# Altium PCB VCO_BFR92_pcb.PcbDoc
Units mm, origin at the board's own origin, x right, y up, seen from the top; angles counter-clockwise.
Board outline 60.58 x 30.35 mm, 2 copper layers (Top Layer, Bottom Layer); 40 components, 21 nets, 91 pads, 14 vias.
Unrouted connection lines stored in the file: 6.
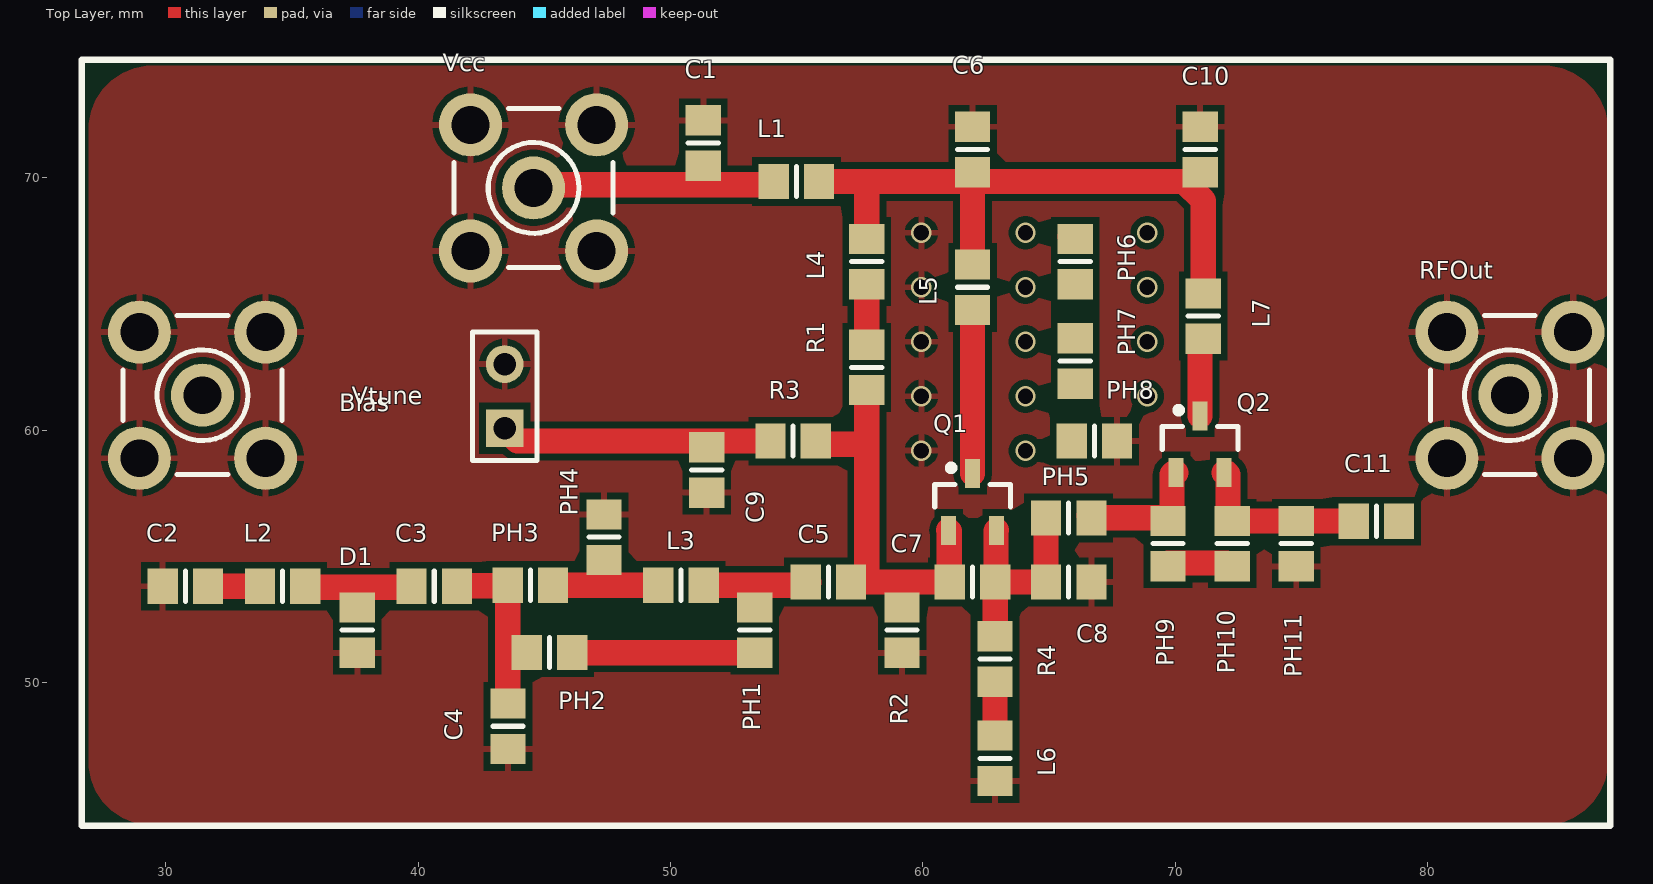
[diagram p0: Top Layer view]
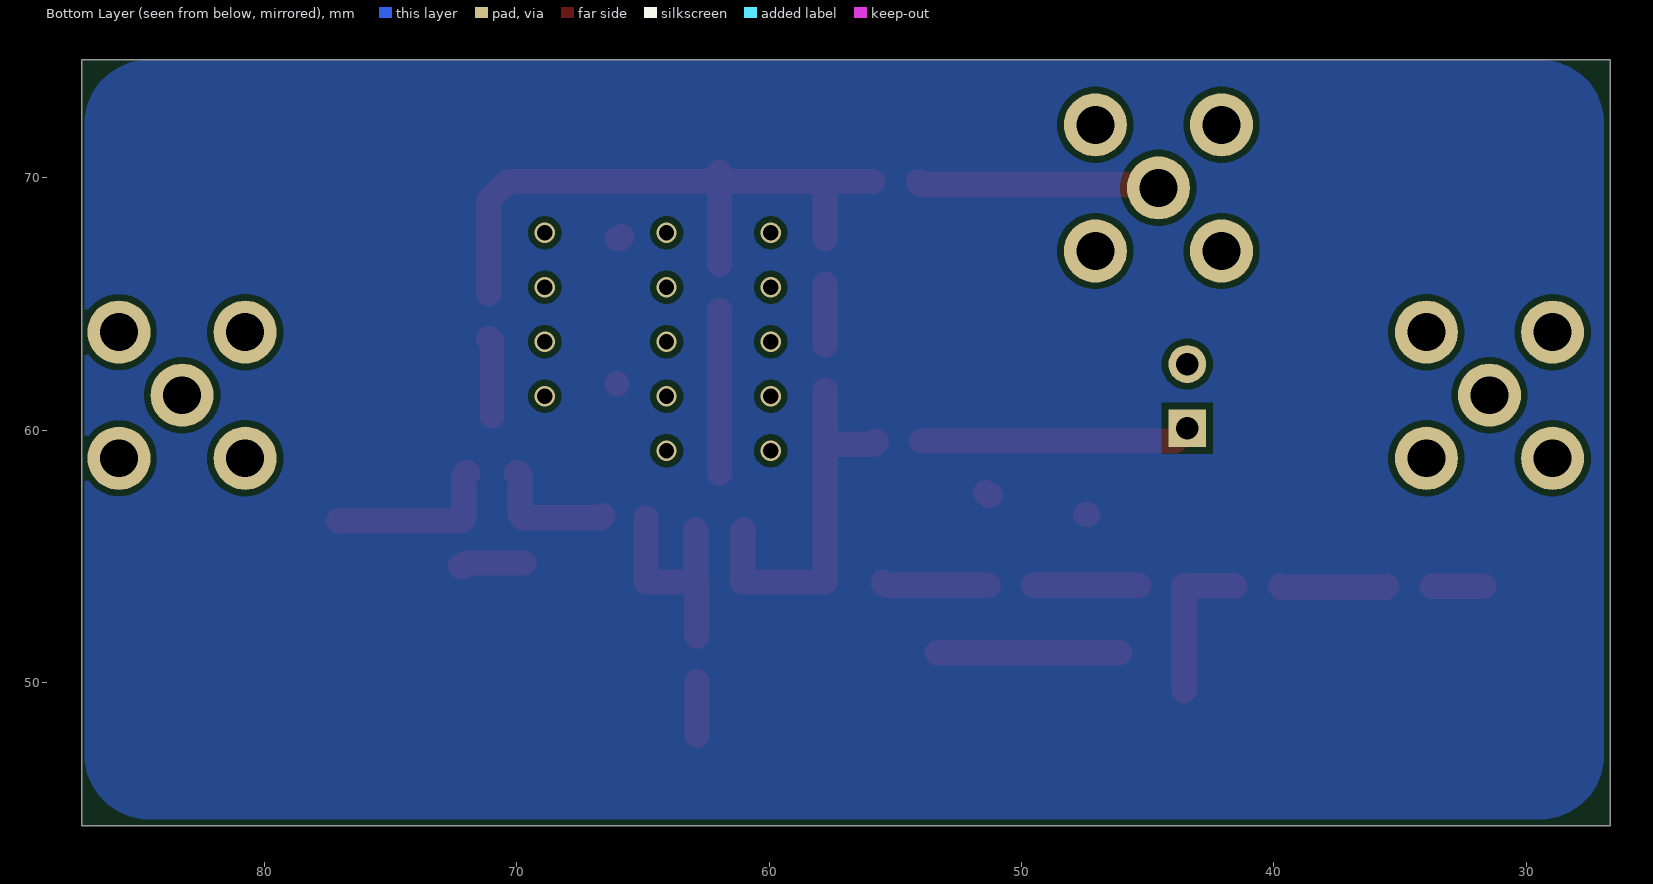
[diagram p1: Bottom Layer view, seen from below]

## Layer stack, top to bottom
Top Solder: solder mask 0.0102, Solder Resist, Dk 3.5
Top Layer: signal copper 0.0356
Dielectric 1: dielectric 0.32, FR-4, Dk 4.8
Bottom Layer: signal copper 0.0356
Bottom Solder: solder mask 0.0102, Solder Resist, Dk 3.5

## Board outline
26.67,44.323 26.67,74.676 87.249,74.676 87.249,44.323

## Design rules (kind name [scope] priority, off if disabled: settings)
Clearance [All] p1: gap=0.254 ignorepadtopadclearanceinfootprint=FALSE except(0: Arc-Hole Track-Hole SMDPad-Hole THPad-Hole Via-Hole Fill-Hole Poly-Hole Region-Hole Text-Hole)
PolygonConnect [All] p1: connectstyle=Relief reliefconductorwidth=0.254 reliefentries=4 polygonreliefangle="90 Angle" airgapwidth=0.254
RoomDefinition Sheet1 [InComponentClass('Sheet1')] p1: confinementstyle=ConfineIn formatcopy=TRUE lockcomponents=FALSE outline 25.596,25.299 101.669,25.299 101.669,76.861 25.596,76.861
RoutingVias [All] p1: holewidth=0.711 width=1.27 viastyle="Through Hole" minholewidth=0.711 minwidth=1.27 maxholewidth=0.711 maxwidth=1.27
SolderMaskExpansion [All] p1: expansion=0.102 istentingtop=FALSE
Width [All] p1: maxlimit=2 minlimit=0.254 preferedwidth=0.254
30 further rules are at their usual default settings.

## Components (designator, comment, footprint, x,y, rotation, side; value= is the part's Value field where it differs from the comment)
Bias "Header 2" HDR1X2 43.434,60.071 r90 top
C1 "Cap Pol2" 6-0805_N 51.308,71.374 r90 top value=47nF
C2 "Cap Pol2" 6-0805_N 30.777,53.808 r180 top value=47nF
C3 "Cap Pol2" 6-0805_N 40.64,53.808 r0 top value=4.3pF
C4 "Cap Pol2" 6-0805_N 43.561,48.26 r270 top value=0.6pF
C5 "Cap Pol2" 6-0805_N 56.261,53.975 r0 top value=100pF
C6 "Cap Pol2" 6-0805_N 61.976,71.12 r90 top value=47pF
C7 "Cap Pol2" 6-0805_N 61.976,53.975 r0 top value=1pF
C8 "Cap Pol2" 6-0805_N 65.786,53.975 r0 top value=3pF
C9 "Cap Pol2" 6-0805_N 51.435,58.42 r270 top value="no mounted"
C10 "Cap Pol2" 6-0805_N 70.993,71.12 r90 top value=47pF
C11 "Cap Pol2" 6-0805_N 77.978,56.388 r0 top value=33pF
D1 "D Varactor" 6-0805_N 37.592,52.07 r270 top
L1 "Inductor" 6-0805_N 54.991,69.85 r0 top value=10mH
L2 "Inductor" 6-0805_N 34.631,53.808 r0 top value=100nH
L3 "Inductor" 6-0805_N 50.419,53.848 r0 top value=10mH
L4 "Inductor" 6-0805_N 57.785,66.675 r90 top value=10mH
L5 "Inductor" 6-0805_N 61.976,65.659 r90 top value=10mH
L6 "Inductor" 6-0805_N 62.865,46.99 r90 top value=10mH
L7 "Inductor" 6-0805_N 71.12,64.516 r90 top value=10mH
PH1 "Res1" 6-0805_N 53.34,52.07 r90 top value=0
PH2 "0" 6-0805_N 45.212,51.181 r0 top value=1K
PH3 "Res1" 6-0805_N 44.45,53.848 r180 top value=1K
PH4 "Res1" 6-0805_N 47.371,55.753 r270 top value=0
PH5 "Res1" 6-0805_N 65.786,56.515 r180 top value=1K
PH6 "Res1" 6-0805_N 66.04,66.675 r90 top value=1K
PH7 "Res1" 6-0805_N 66.04,62.738 r90 top value=1K
PH8 "Res1" 6-0805_N 66.802,59.563 r180 top value=1K
PH9 "Res1" 6-0805_N 69.723,55.499 r270 top value=1K
PH10 "Res1" 6-0805_N 72.263,55.499 r270 top value=1K
PH11 "Res1" 6-0805_N 74.803,55.499 r270 top value=1K
Q1 "NPN" SOT23_N 61.976,57.15 r90 top
Q2 "NPN" SOT23_N 70.993,59.436 r90 top
R1 "Res1" 6-0805_N 57.785,62.484 r90 top value=1.5K
R2 "Res1" 6-0805_N 59.182,52.07 r90 top value=2.7K
R3 "Res1" 6-0805_N 54.864,59.563 r180 top value=1K
R4 "Res1" 6-0805_N 62.865,50.927 r90 top value=220
RFOut "SMB" SMB_V-RJ45 83.272,61.381 r0 top
Vcc "SMB" SMB_V-RJ45 44.577,69.596 r0 top
Vtune "SMB" SMB_V-RJ45 31.456,61.381 r0 top

## Footprints (in the part's own frame and the unit in brackets; to place one, negate y for a bottom-side part, rotate by r counter-clockwise, add the part's x,y. Pads: shape width x height; smd on the part's side, far side on the other; paste and mask are expansions set on the pad)
6-0805_N [mm] "Chip Resistor, Body 2.0x1.2mm, IPC Medium Density"
  rect 1.2x1.4 smd: 1(-0.9,0) 2(0.9,0)
  silkscreen extent 0,-0.6 0,0.6, body extent -1.07,-0.7 1.07,0.7, height 0.7
HDR1X2 [mm] "Connector; Header; 2 Position"
  rect 1.5x1.5 hole 0.9: 1(0,0)
  round 1.5 hole 0.9: 2(2.54,0)
  silkscreen extent -1.27,-1.27 3.81,1.27
SMB_V-RJ45 [mm] "Connector; SMB Straight"
  round 2.5 hole 1.5: 1(0,0) 2(-2.5,-2.5) 2(-2.5,2.5) 2(2.5,-2.5) 2(2.5,2.5)
  silkscreen extent -3.15,-3.15 3.15,3.15
SOT23_N [mm] "SOT23, 3-Leads, Body 2.9x1.3mm, Pitch 0.95mm, Lead Span 2.3mm - Reverse Pinning, IPC Medium Density"
  rect 1.15x0.6 smd: 1(1.125,0) 2(-1.125,-0.95) 3(-1.125,0.95)
  silkscreen extent -0.2,-1.5 1.47,1.5, body extent -0.7,-1.5 0.7,1.5, height 1.1

## Part data
Bias: "Header, 2-Pin", LatestRevisionDate=17-Jul-2002, LatestRevisionNote="Re-released for DXP Platform.", Publisher="Altium Limited"
C1 C2 C3 C4 C5 C6 C7 C8 C9 C10 C11: "Polarized Capacitor (Axial)", LatestRevisionDate=17-Jul-2002, LatestRevisionNote="Re-released for DXP Platform.", PackageDescription="Polarized Capacitor; 2 Leads", PackageReference=POLAR0.8, Published=8-Jun-2000, Publisher="Altium Limited"
D1: "Variable Capacitance Diode", ComponentLink1Description="Manufacturer Link", ComponentLink1URL=http://www.zetex.com/, DatasheetVersion=Jan-1998, LatestRevisionDate=29-May-2009, LatestRevisionNote="IPC-7351 Footprint Added.", Note="Pin 2 is not connected and not drawn.", PackageDescription="3-Pin SOT-23 Package 0.95 mm Pitch, 2.3 mm Lead Span - Reverse Pinning", PackageReference=SOT23A, PackageVersion=1996, Published=8-Jun-2000, Publisher="Altium Limited"
PH1 PH3 PH4 PH5 PH6 PH7 PH8 PH9 PH10 PH11 R1 R2 R3 R4: "Resistor", LatestRevisionDate=17-Jul-2002, LatestRevisionNote="Re-released for DXP Platform.", PackageDescription="Axial Device, Thru-Hole; 2 Leads; 0.3 in Pin Spacing", PackageReference=AXIAL-0.3, Published=8-Jun-2000, Publisher="Altium Limited"
PH2: library part Res1, "Resistor", LatestRevisionDate=17-Jul-2002, LatestRevisionNote="Re-released for DXP Platform.", PackageDescription="Axial Device, Thru-Hole; 2 Leads; 0.3 in Pin Spacing", PackageReference=AXIAL-0.3, Published=8-Jun-2000, Publisher="Altium Limited"
Q1 Q2: "NPN Bipolar Transistor", Code_JEDEC=TO-226-AA, LatestRevisionDate=17-Jul-2002, LatestRevisionNote="Re-released for DXP Platform.", PackageDescription="TO, Flat Index; 3 In-Line, Axial Leads; Body Dia. 4.8mm; Leads 0.55 x 0.51 mm (max)", PackageReference=TO-226-AA, Published=8-Jun-2000, Publisher="Altium Limited"
RFOut Vcc Vtune: "SMB Straight Connector", LatestRevisionDate=17-Jul-2002, LatestRevisionNote="Re-released for DXP Platform.", Publisher="Altium Limited"
L1 L2 L3 L4 L5 L6 L7: Code_IEC=1005, Code_JEITA=0402, LatestRevisionDate=29-May-2009, LatestRevisionNote="IPC-7351 Footprint Added.", PackageDescription="Chip Inductor", PackageReference=0402-A, Published=8-Jun-2000, Publisher="Altium Limited"

## Via types
v1: diameter 0.8, hole 0.6, Top Layer to Bottom Layer, 14 vias

## Nets (pads, with @x,y where several pads share a name; then routed paths per layer and width w, separated by ;. In a path a pad name is that pad's centre, name@x,y a point inside that pad or via, vN(x,y) a via of type N, cw(c..) or ccw(c..) an arc to the next point about the centre after c; other vN are vias at no path point)
B: C5.2 C7.1 Q1.3 R1.1 R2.2 R3.1 | length 15.1
  Top Layer w1: R3.1 55.764,59.536 55.864,59.436 57.785,59.436 ; R1.1 57.785,59.436 ; Q1.3 61.051,56 61.051,54 C7.1 57.785,53.975 57.785,59.436
C: L5.1 Q1.1 | length 6.5
  Top Layer w1: Q1.1 L5.1
GND: Bias.2 C1.2 C2.2 C4.2 C6.2 C8.2 C9.2 C10.2 D1.2 L6.1 PH4.1 PH8.1 PH11.2 R2.1 RFOut.2 Vcc.2 Vtune.2 | length 0.3
  Top Layer w1: PH4.1 PH4.1@47.471,56.653 ; C9.2@51.235,57.42 51.335,57.42 C9.2
  other v1: 59.944,59.182 59.944,61.341 59.944,63.5 59.944,65.659 59.944,67.818
NetBias_1: Bias.1 C9.1 R3.2 | length 10.7
  Top Layer w1: Bias.1 43.942,59.563 R3.2
NetC1_1: C1.1 L1.1 Vcc.1 | length 9.6
  Top Layer w1: Vcc.1 44.704,69.723 53.991,69.723 54.091,69.823 L1.1
NetC2_1: C2.1 L2.1 Vtune.1 | length 2.1
  Top Layer w1: C2.1 L2.1
NetC3_1: C3.1 D1.1 L2.2 | length 4.2
  Top Layer w1: L2.2 35.569,53.77 39.702,53.77 C3.1
NetC3_2: C3.2 C4.1 PH2.1 PH3.2 | length 6.2
  Top Layer w1: C3.2 41.56,53.828 43.53,53.828 PH3.2 43.55,49.674 C4.1@43.556,49.668
NetC5_1: C5.1 L3.2 PH1.2 | length 4.2
  Top Layer w1: L3.2 55.388,53.848 55.488,53.948 C5.1@55.488,53.975
NetC6_1: C6.1 C10.1 L1.2 L4.2 L5.2 L7.2 PH6.2 | length 25.4
  Top Layer w1: L1.2 57.785,69.85 ; L4.2 57.785,69.85 ; L5.2 C6.1@61.976,69.85 ; C6.1 C6.1@61.976,69.85 ; PH6.2@65.84,67.675 65.94,67.575 PH6.2 ; L7.2 71.12,69.088 70.358,69.85 65.405,69.85 C6.1@61.976,69.85 ; 57.785,69.85 C6.1@61.976,69.85
NetC7_2: C7.2 C8.1 PH5.2 Q1.2 R4.2 | length 8.8
  Top Layer w1: R4.2 62.87,51.833 62.87,53.97 C7.2 ; Q1.2 62.901,56 62.901,54 C7.2 ; PH5.2 C8.1 C7.2
NetC11_1: C11.1 PH10.1 PH11.1 Q2.2 | length 6.9
  Top Layer w1: Q2.2 72.028,58.311 72.103,58.236 72.103,56.499 72.203,56.399 PH10.1 72.269,56.393 77.073,56.393 C11.1
NetC11_2: C11.2 RFOut.1
NetL3_1: L3.1 PH3.1 PH4.2 | length 4.2
  Top Layer w1: PH3.1@45.35,53.848 L3.1@49.519,53.848
NetL4_1: L4.1 R1.2 | length 2.4
  Top Layer w1: R1.2 L4.1
NetL6_2: L6.2 R4.1 | length 2.1
  Top Layer w1: L6.2 R4.1
NetL7_1: L7.1 Q2.1 | length 3.1
  Top Layer w1: Q2.1 70.993,63.516 71.093,63.616 L7.1
NetPH1_1: PH1.1 PH2.2 | length 7.2
  Top Layer w1: PH2.2 46.118,51.176 53.334,51.176 PH1.1
NetPH5_1: PH5.1 PH7.1 PH8.2 PH9.1 Q2.3 | length 5.2
  Top Layer w1: PH7.1@66.034,61.833 PH7.1 ; PH5.1@66.586,56.615 PH5.1 66.691,56.52 69.718,56.52 69.723,56.526 69.783,56.526 69.883,56.626 69.883,58.236 69.958,58.311 Q2.3
NetPH6_1: PH6.1 PH7.2
NetPH9_2: PH9.2 PH10.2 | length 2.6
  Top Layer w1: PH9.2@69.723,54.726 72.036,54.726 72.163,54.599 PH10.2
copper on no net:
  other v1: 64.072,59.182 64.072,61.341 68.897,61.341 64.072,63.5 68.897,63.5 64.072,65.659 68.897,65.659 64.072,67.818 68.897,67.818

## Polygon pours and split planes (outlines as drawn)
no net on Bottom Layer "NONET_L02_P001" (solid, pour order 1): 29.464,44.577 cw(c29.464,47.117) 26.924,47.117 26.924,72.136 cw(c29.464,72.136) 29.464,74.676 84.582,74.676 cw(c84.582,72.136) 87.122,72.136 87.122,47.117 cw(c84.582,47.117) 84.582,44.577
GND on Top Layer "GND_L01_P000" (solid, remove dead copper, pour order 0): 29.483,44.338 cw(c29.483,46.878) 26.943,46.878 26.943,71.897 cw(c29.483,71.897) 29.483,74.437 84.601,74.437 cw(c84.601,71.897) 87.141,71.897 87.141,46.878 cw(c84.601,46.878) 84.601,44.338

## Silkscreen, mask and mechanical layers (free items; w line width, h text height)
Top Overlay:
  lines w0.254: 26.67,44.323 26.67,74.676 36.449,74.676 87.249,74.676 87.249,44.323 26.67,44.323

## Dimensions
26.67,74.676 to 26.67,44.323 on Top Overlay
25.4,70.612 to 85.974,75.921 on Top Overlay